# Altium PCB aaa_Empty_PCB_2_Layers.PcbDoc
Units mm, origin at the board's own origin, x right, y up, seen from the top; angles counter-clockwise.
Board outline 100 x 100 mm, 4 copper layers (Top Layer, Signal Layer 2, GND Layer 3, Bottom Layer), stack 2.294 mm thick; 1 components, 2 nets, 0 pads, 0 vias.
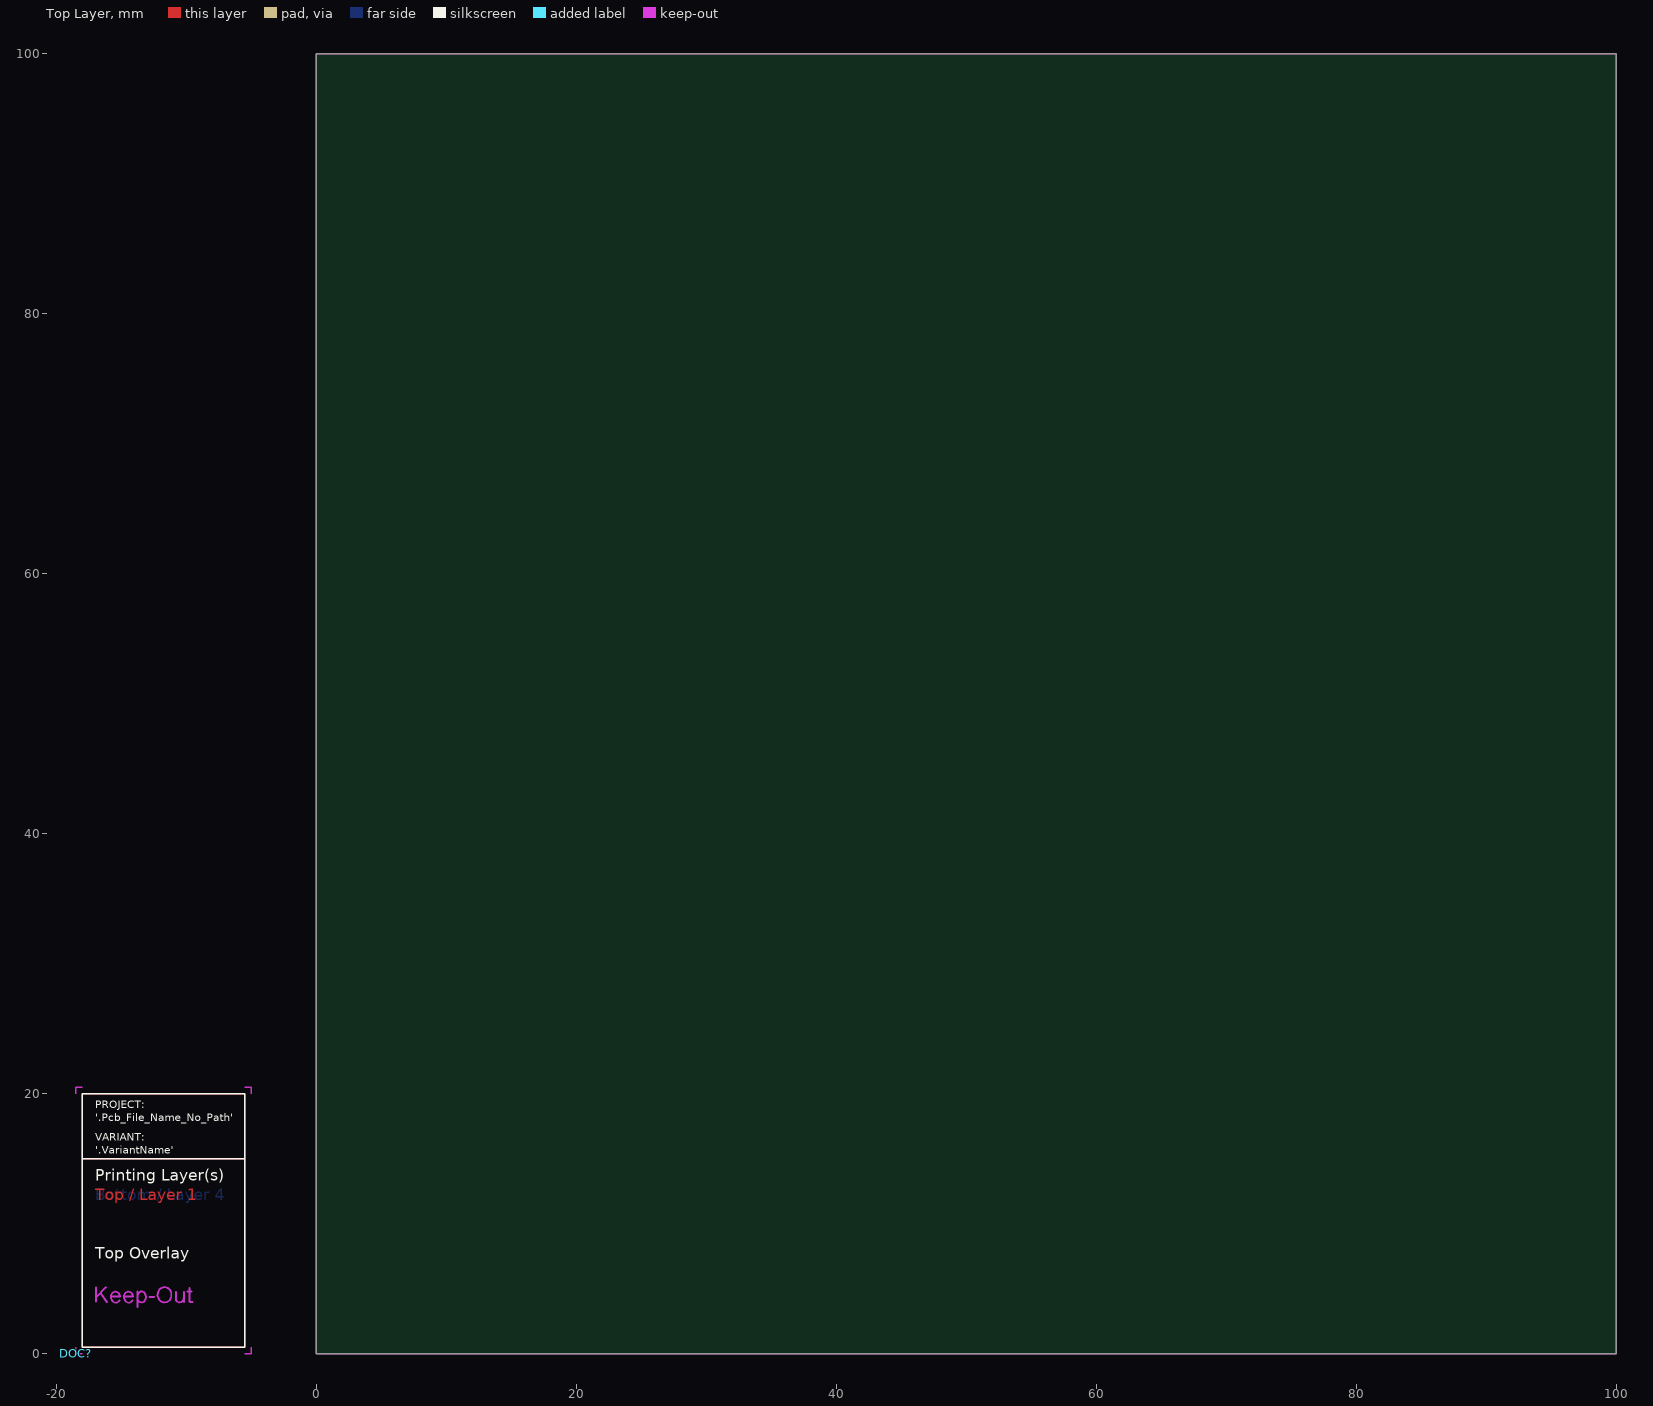
[diagram p0: Top Layer view]
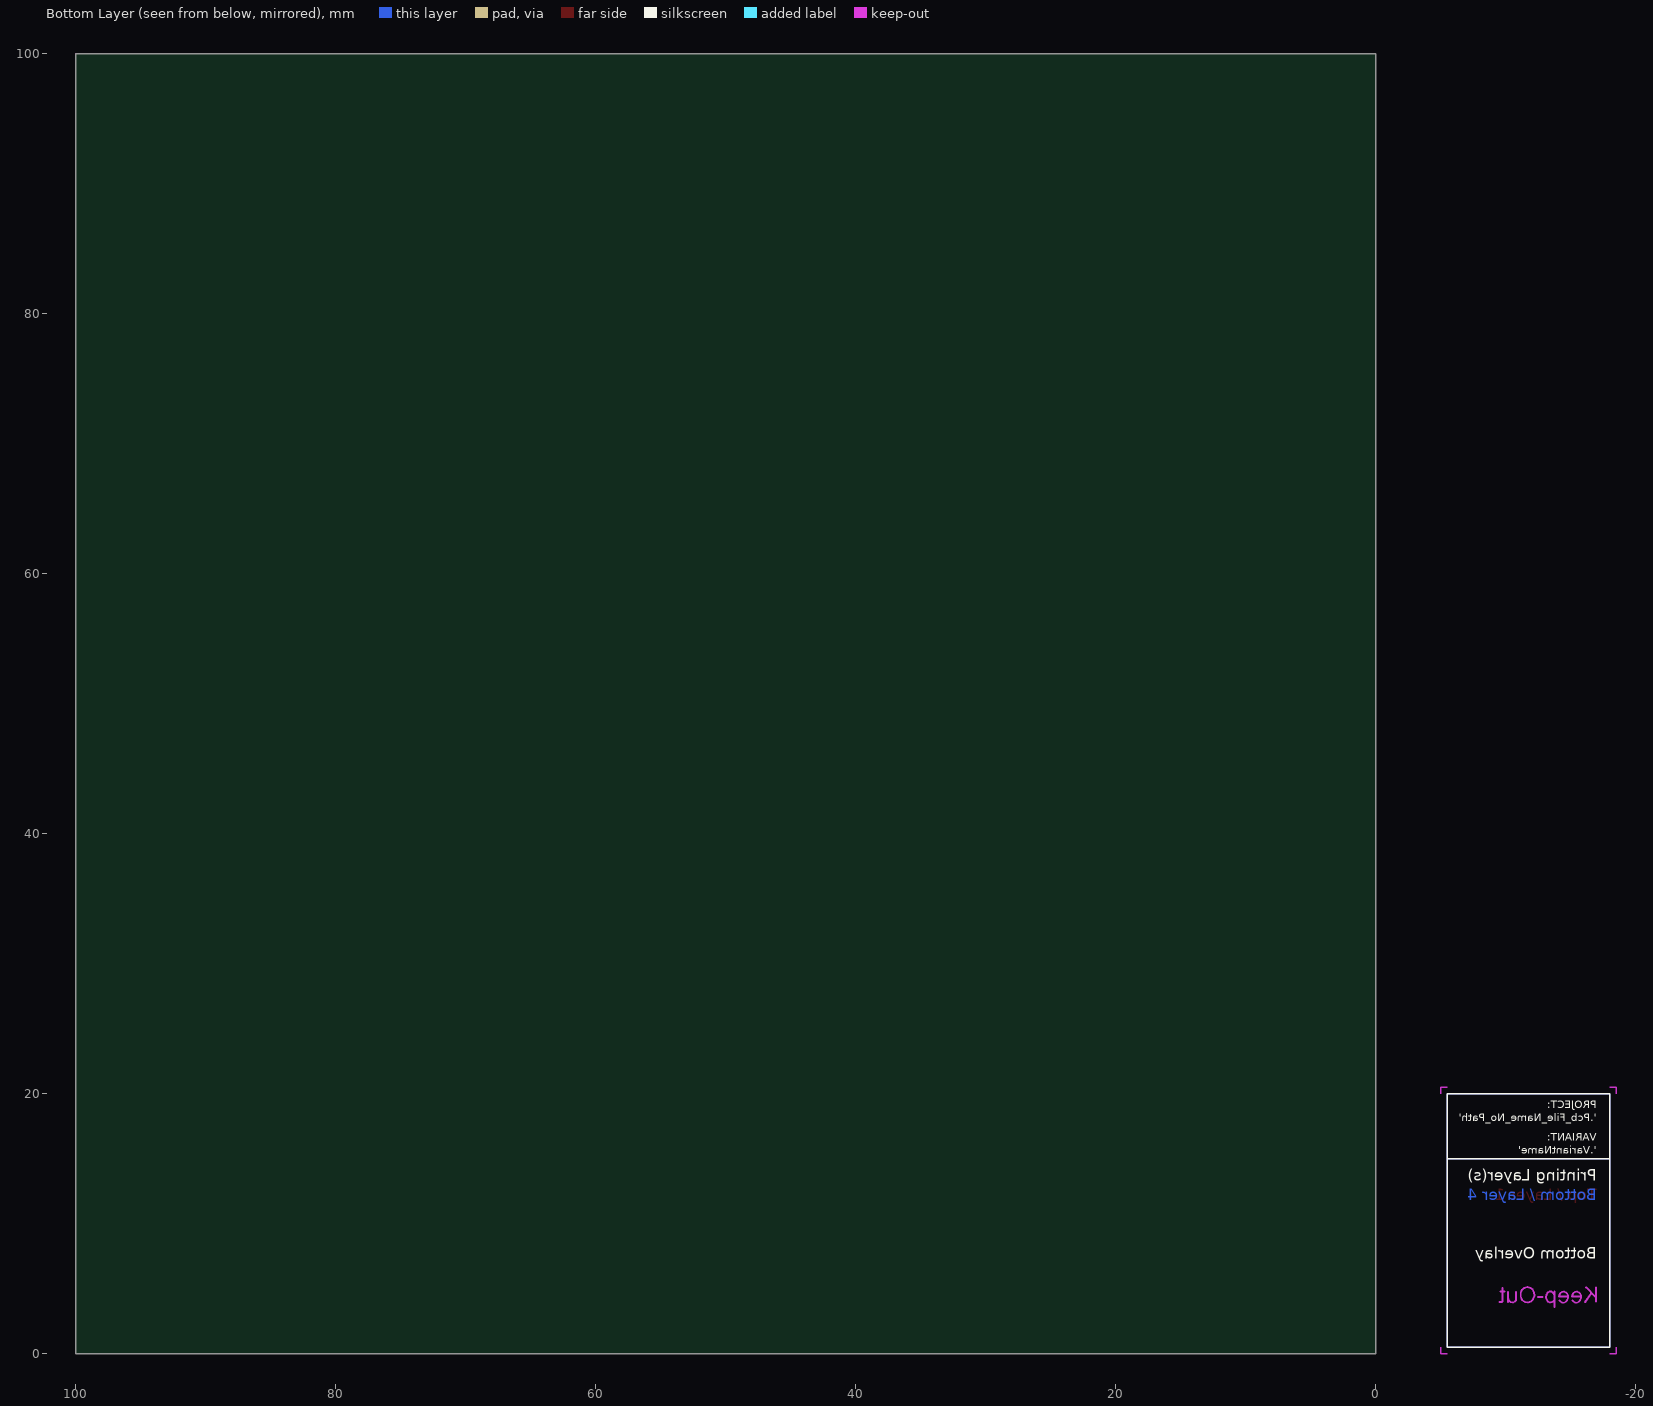
[diagram p1: Bottom Layer view, seen from below]
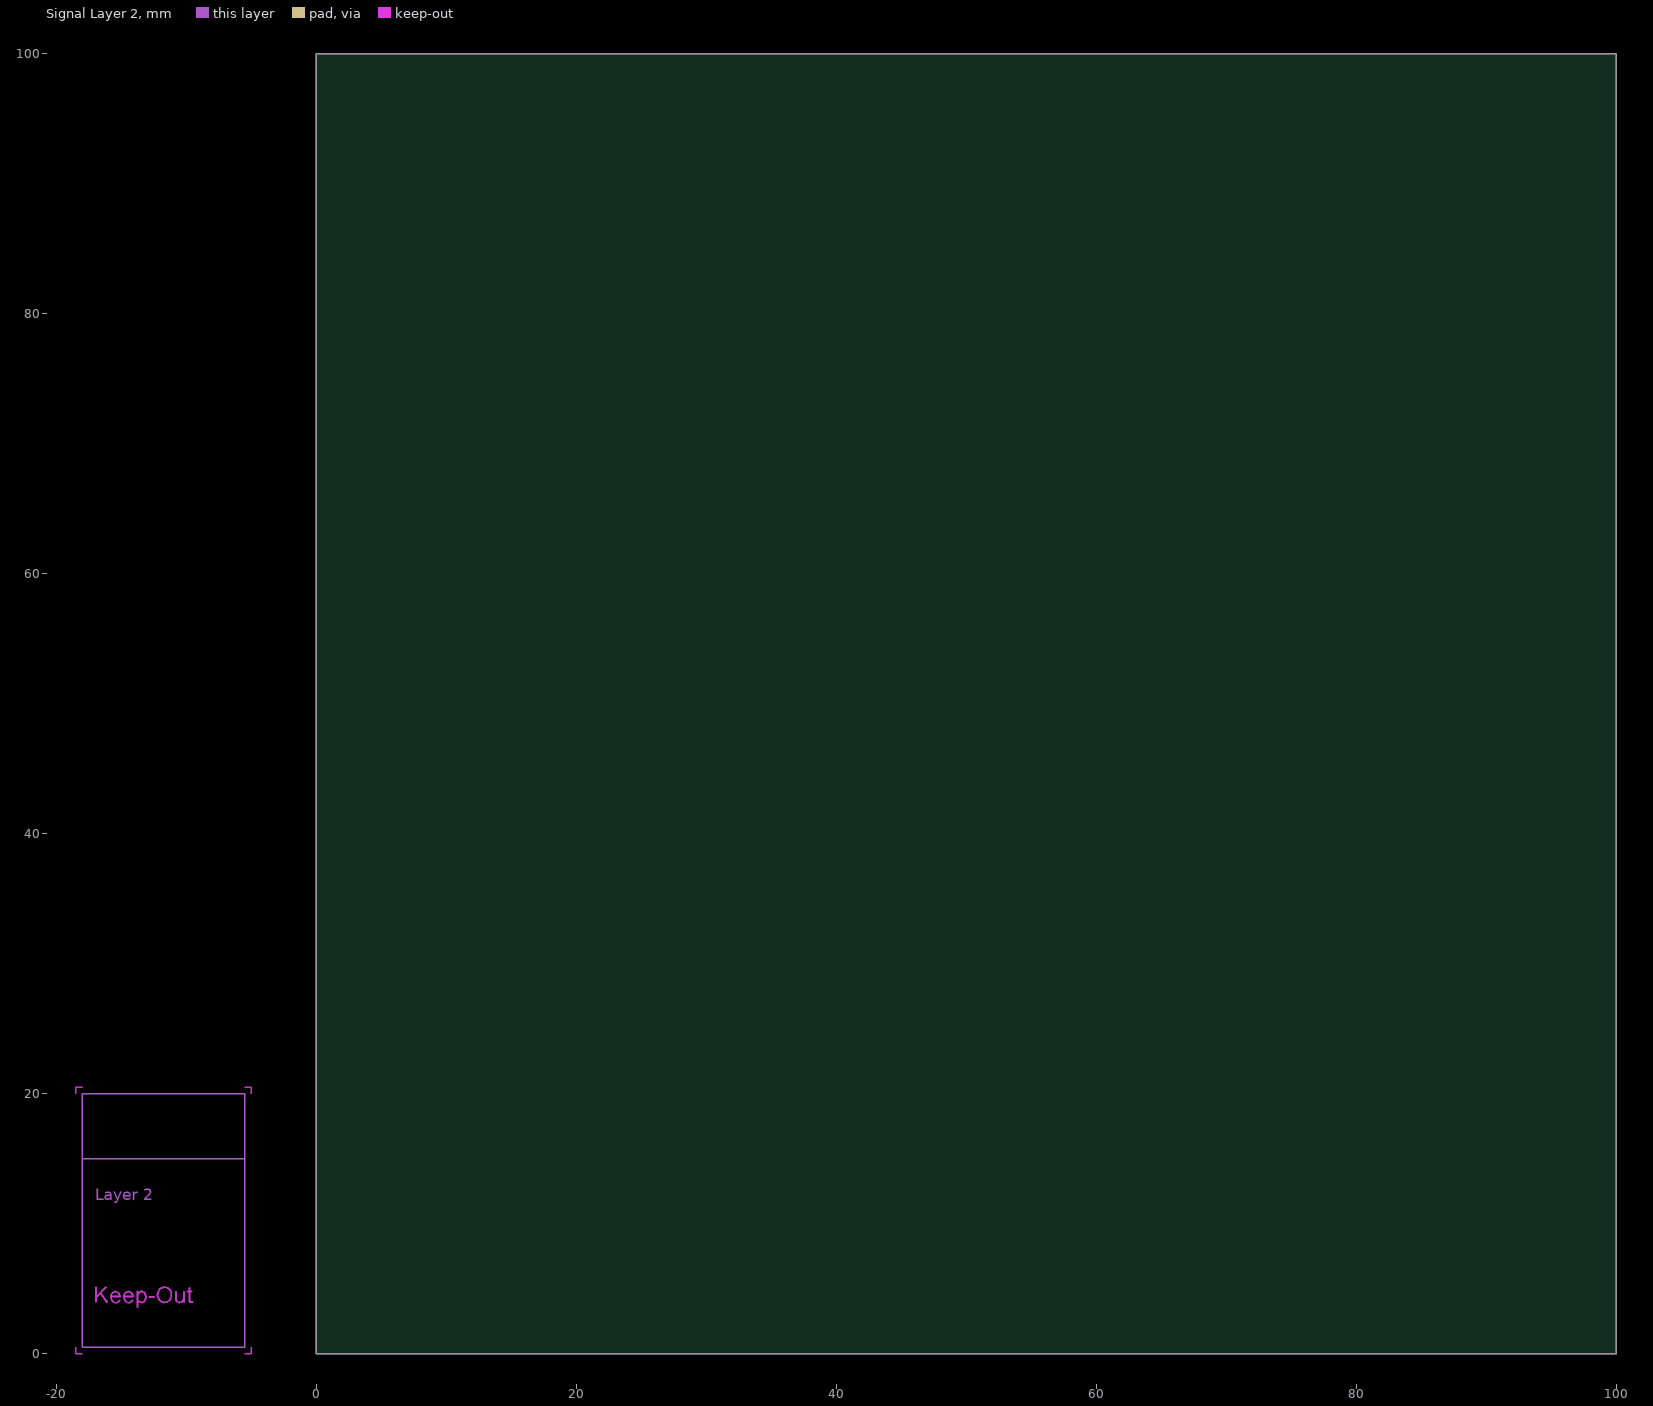
[diagram p2: Signal Layer 2]
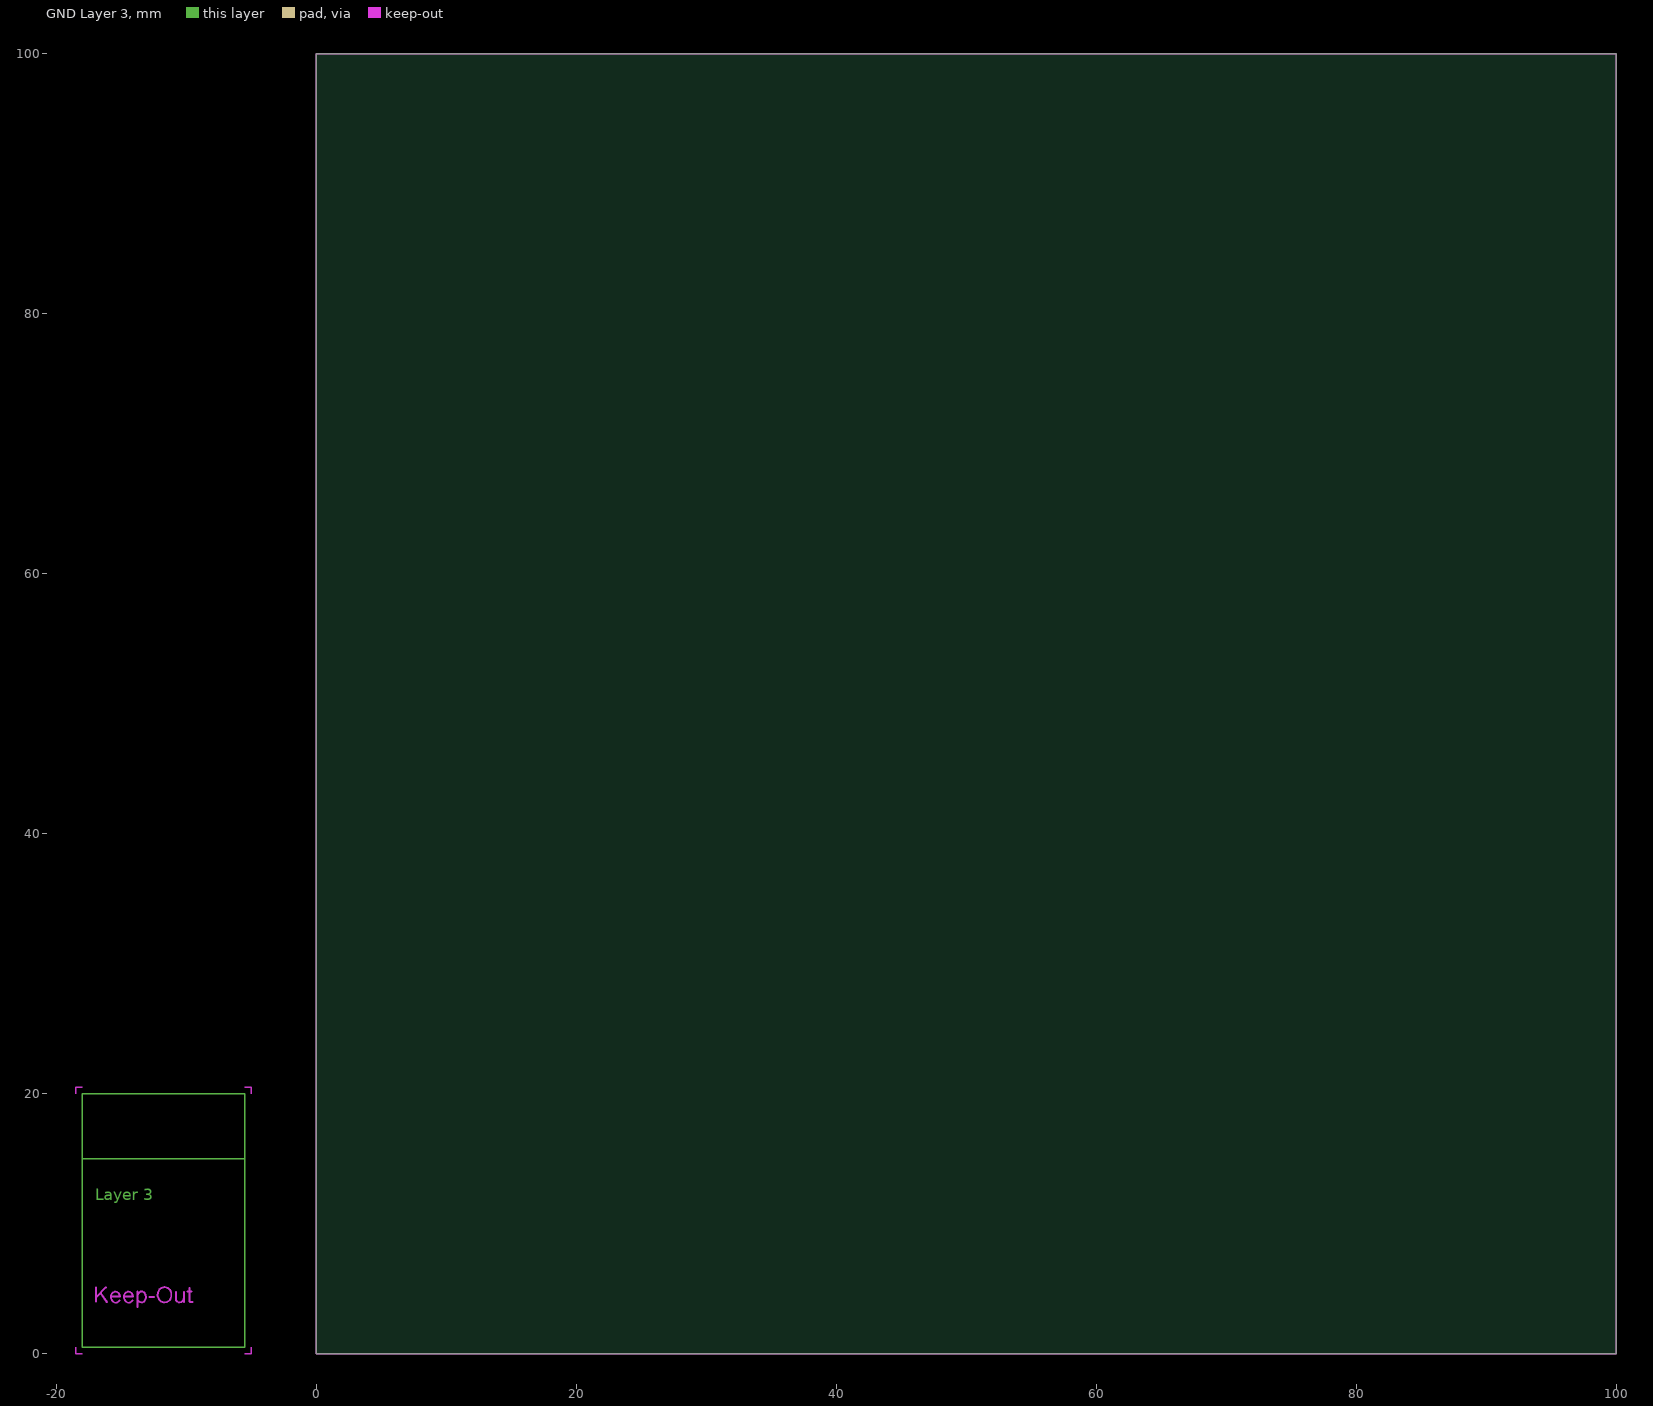
[diagram p3: GND Layer 3]

## Layer stack, top to bottom
Top Solder: solder mask 0.03, Solder Resist, Dk 3.5
Top Layer: signal copper 0.035
Dielectric 1: core 1.514, FR-4, Dk 4.2
Signal Layer 2: signal copper 0.035
Dielectric3: dielectric 0.32, FR-4, Dk 4.8
GND Layer 3: signal copper 0.035
Dielectric1: dielectric 0.32, FR-4, Dk 4.8
Bottom Layer: signal copper 0.035
Bottom Solder: solder mask 0.03, Solder Resist, Dk 3.5

## Board outline
0,0 0,100 100,100 100,0

## Design rules (kind name [scope] priority, off if disabled: settings)
BoardOutlineClearance [All] p1: gap=0.254 ignorepadtopadclearanceinfootprint=FALSE except(0: Arc-SplitContinuation Track-SplitContinuation SMDPad-SplitContinuation THPad-SplitContinuation Via-SplitContinuation Fill-SplitContinuation Poly-SplitContinuation Region-SplitContinuation Text-SplitContinuation)
Clearance Clearance_Mini-IC [InNetClass('Mini-IC-Connections')] p1: gap=0.15 ignorepadtopadclearanceinfootprint=TRUE
Clearance Clearance_Text_BOT [InComponent('XXXX_CON101') vs (OnBottomLayer AND IsText)] p2 off: gap=0.01 ignorepadtopadclearanceinfootprint=FALSE except(0: Arc-Hole Track-Hole SMDPad-Hole THPad-Hole Via-Hole Fill-Hole Poly-Hole Region-Hole Text-Hole)
Clearance Clearance_Antennas [(   InComponent('HYB301') OR InComponent('HYB302') OR InComponent('HYB303')  OR InComponent('MEC504') ) vs (   InComponent('HYB301') OR InComponent('HYB302') OR InComponent('HYB303')  OR InComponent('MEC504') )] p3 off: gap=-3 ignorepadtopadclearanceinfootprint=FALSE
Clearance Clearance_GND-Planes [(InNet('GND') OR InNet('SGND')) and InPolygon] p4 off: gap=0.2 ignorepadtopadclearanceinfootprint=TRUE
Clearance [All] p5: gap=0.3 ignorepadtopadclearanceinfootprint=TRUE
ComponentClearance ComponentClearance_HYB_TOP [(   InComponent('HYB301') OR InComponent('HYB302') OR InComponent('HYB303') ) vs (   InComponent('HYB301') OR InComponent('HYB302') OR InComponent('HYB303')   )] p1: gap=-0.1 collisioncheckmode=3 verticalgap=2540 showdistances=FALSE
ComponentClearance ComponentClearance_FREEDOM_TOP [(   InComponent('HYB300'))] p2: gap=-0.1 collisioncheckmode=3 verticalgap=2540 showdistances=FALSE
ComponentClearance ComponentClearance_TP [(HasFootprint('TESTPAD_RND_28') OR HasFootprint('TESTPAD_RND_40'))] p3: gap=-20 collisioncheckmode=3 verticalgap=2 showdistances=FALSE
ComponentClearance ComponentClearance_MEC1&2 [(InComponent('xxx_MEC1') OR InComponent('xxx_MEC2'))] p4: gap=-2 collisioncheckmode=3 verticalgap=-20 showdistances=FALSE
ComponentClearance [All] p5: gap=0.2 collisioncheckmode=3 verticalgap=0.3 showdistances=FALSE
HoleSize [All] p1: absolutevalues=TRUE maxlimit=22 minlimit=0.3 maxpercent=80.000 minpercent=20.000
HoleToHoleClearance [All] p1: gap=0.25 allowstackedmicrovias=TRUE
MinimumAnnularRing [All] p1: minimumring=0.2
MinimumSolderMaskSliver MinimumSolderMaskSliver_CloseComp [InComponent('X100') OR  InComponent('LED203') OR InComponent('LED301') OR InComponent('U206') OR InComponent('U200') OR InComponent('S200') OR InComponent('R301') OR InComponent('LED300') OR InComponent('U302') OR InComponent('U301') OR InComponent('R302') OR InComponent('R303') vs InComponent('X100') OR  InComponent('LED203') OR InComponent('LED301') OR InComponent('U206') OR InComponent('U200') OR InComponent('S200') OR InComponent('R301') OR InComponent('LED300') OR InComponent('U302') OR InComponent('U301') OR InComponent('R302') OR InComponent('R303')] p1 off: minsoldermaskwidth=0.01
MinimumSolderMaskSliver MinimumSolderMaskSliver_CloseComp_1 [InComponent('C210') OR InComponent('C213') OR InComponent('C214') OR InComponent('Y200') OR InComponent('U206') OR InComponent('TP200') OR InComponent('TP201') OR InComponent('Y201') OR InComponent('U300') vs InComponent('C210') OR InComponent('C213') OR InComponent('C214') OR InComponent('Y200') OR InComponent('U206') OR InComponent('TP200') OR InComponent('TP201') OR InComponent('Y201') OR InComponent('U300')] p2 off: minsoldermaskwidth=0.01
MinimumSolderMaskSliver MinimumSolderMaskSliver_CloseComp_2 [InComponent('C204') OR InComponent('C207') OR InComponent('C209') OR InComponent('C212') OR InComponent('R203') OR InComponent('R204') OR InComponent('U203') OR InComponent('U204') OR InComponent('U205') OR InComponent('IC200') OR InComponent('Y201') OR InComponent('Y200') OR InComponent('TP201') vs InComponent('C204') OR InComponent('C207') OR InComponent('C209') OR InComponent('C212') OR InComponent('R203') OR InComponent('R204') OR InComponent('U203') OR InComponent('U204') OR InComponent('U205') OR InComponent('IC200') OR InComponent('Y201') OR InComponent('Y200') OR InComponent('TP201')] p3 off: minsoldermaskwidth=0.01
MinimumSolderMaskSliver MinimumSolderMaskSliver_TextComp [InComponent('CON200') OR InComponent('X100') OR InComponent('S200') OR InComponent('U301') OR IsText vs InComponent('CON200') OR InComponent('X100') OR InComponent('S200') OR InComponent('U301') OR IsText] p4 off: minsoldermaskwidth=0.01
MinimumSolderMaskSliver [All] p5: minsoldermaskwidth=0.1
PasteMaskExpansion [All] p1: expansion=-0.05
PolygonConnect PolygonConnect_Direct [All] p1: connectstyle=Direct reliefconductorwidth=0.254 reliefentries=4 polygonreliefangle="90 Angle" airgapwidth=0.254
PolygonConnect PolygonConnect_Connector [(InComponent('X100') or InComponent('X111') or InComponent('X112') or InComponent('X101') or InComponent('X106')or InComponent('X107') or InComponent('X104') or InComponent('X105')) AND InNet('GND')] p2 off: connectstyle=Direct reliefconductorwidth=0.254 reliefentries=4 polygonreliefangle="90 Angle" airgapwidth=0.254
PolygonConnect PolygonConnect_Via [IsVia] p3 off: connectstyle=Direct reliefconductorwidth=0.254 reliefentries=4 polygonreliefangle="90 Angle" airgapwidth=0.254
PolygonConnect [All] p4 off: connectstyle=Relief reliefconductorwidth=0.254 reliefentries=4 polygonreliefangle="90 Angle" airgapwidth=0.254
RoomDefinition U103 [InComponentClass('U103')] p1: confinementstyle=ConfineIn formatcopy=TRUE lockcomponents=FALSE outline -17,-14.5 213,-14.5 213,178.1 -17,178.1
RoomDefinition U102 [InComponentClass('U102')] p2: confinementstyle=ConfineIn formatcopy=TRUE lockcomponents=FALSE outline -26.8,-3.5 229.2,-3.5 229.2,203.5 -26.8,203.5
RoomDefinition U101 [InComponentClass('U101')] p3: confinementstyle=ConfineIn formatcopy=TRUE lockcomponents=FALSE outline -30,-9.5 186.9,-9.5 186.9,198 -30,198
RoomDefinition U100 [InComponentClass('U100')] p4: confinementstyle=ConfineIn formatcopy=TRUE lockcomponents=FALSE outline -22.1,8.2 194.5,8.2 194.5,183.5 -22.1,183.5
RoutingVias [All] p1: holewidth=0.4 width=0.9 viastyle="Through Hole" minholewidth=0.3 minwidth=0.6 maxholewidth=0.8 maxwidth=1.2
SilkToSilkClearance [All] p1 off: silktosilkclearance=0.254
SilkToSolderMaskClearance SilkscreenOverComponentPads [IsPad] p1 off: minsilkscreentomaskgap=0.254 clearancetoexposedcopper=TRUE
SolderMaskExpansion [All] p1: expansion=0.102 istentingtop=FALSE
Width [All] p1: maxlimit=10 minlimit=0.15 preferedwidth=0.3 minimp=50.000000 maximp=50.000000 favimp=50.000000
23 further rules are at their usual default settings.

## Components (designator, comment, footprint, x,y, rotation, side; value= is the part's Value field where it differs from the comment)
DOC? "Legend of PCB Layers" "LEGEND OF VISABLE LAYERS FOR PCB OUTPUT FILES (UP TO 4 LAYER PCBS)" -18.5,0 r0 top

## Footprints (in the part's own frame and the unit in brackets; to place one, negate y for a bottom-side part, rotate by r counter-clockwise, add the part's x,y. Pads: shape width x height; smd on the part's side, far side on the other; paste and mask are expansions set on the pad)
"LEGEND OF VISABLE LAYERS FOR PCB OUTPUT FILES (UP TO 4 LAYER PCBS)" [mm] "Description Legend for Documentation"
  Keep-Out Layer lines w0.1: 0,0.5 0,0 0.5,0 ; 0,20 0,20.5 0.5,20.5 ; 13,0 13.5,0 13.5,0.5 ; 13,20.5 13.5,20.5 13.5,20
  Keep-Out Layer lines w0.15: 1.575,4 1.575,5.1 ; 1.6,4.375 2.325,5.1 ; 1.925,4.65 2.4,3.975 ; 2.725,4.4 3.4,4.4 3.375,4.55 3.3,4.675 3.175,4.75 3.025,4.775 2.875,4.725 2.775,4.625 2.725,4.5 2.725,4.3 2.775,4.125 2.875,4 3.025,3.925 3.175,3.95 3.325,4.05 3.375,4.1 ; 3.725,4.4 4.4,4.4 4.375,4.55 4.3,4.675 4.175,4.75 4.025,4.775 3.875,4.725 3.775,4.625 3.725,4.5 3.725,4.3 3.775,4.125 3.875,4 4.025,3.925 4.175,3.95 4.325,4.05 4.375,4.1 ; 4.75,3.6 4.75,4.775 ; 4.75,4.5 4.85,4.675 4.975,4.775 5.125,4.775 5.275,4.7 5.375,4.55 5.4,4.325 5.35,4.15 5.25,4 5.1,3.95 4.95,3.975 4.775,4.1 ; 5.675,4.375 6.025,4.375 ; 6.825,5.125 6.6,5.075 6.425,4.95 6.325,4.725 6.3,4.45 6.4,4.2 6.55,4.025 6.775,3.95 7.025,3.975 7.25,4.125 7.35,4.4 7.35,4.7 7.25,4.925 7.075,5.075 6.85,5.125 ; 7.725,4.75 7.725,4.1 7.825,4 7.95,3.95 8.125,3.975 8.275,4.125 8.325,4.325 8.325,4.75 8.325,3.975 ; 8.75,5.05 8.75,4.775 ; 8.975,3.975 8.925,3.975 8.8,3.975 8.75,4.05 8.75,4.775 ; 8.75,4.775 8.925,4.775 8.6,4.775 8.75,4.775
  Multi-Layer lines w0.1: 0.5,15 13,15 ; 0.5,0.5 13,0.5 13,20 0.5,20 0.5,0.5
  silkscreen extent 0.5,0.5 13,20

## Part data
DOC?: library part "Legend of Visable Layers for PCB Output Files (up to 4 Layer PCBs)", "To show in a table, beside the designed Printed Circuit Board, all visable PCB layers at the generated PDF and Gerber/ODB++ Outputs for Documentation. With this Legend one can see clearly which Layers are actually shown at a certain plot.", ComponentLink1Description="Show Datasheet on SMS Drive", ComponentLink1URL="P:\Electronic Workshop\Datasheets (Refered in Libraries - Don't Change!)\", Latest Revision Date=8.6.2019, Latest Revision Made By="Michael Herold-Nadig", Latest Revision Note="New Part"

## Nets (pads, with @x,y where several pads share a name; then routed paths per layer and width w, separated by ;. In a path a pad name is that pad's centre, name@x,y a point inside that pad or via, vN(x,y) a via of type N, cw(c..) or ccw(c..) an arc to the next point about the centre after c; other vN are vias at no path point)
+3V0: 
GND: 

## Keep-outs
Keep-Out Layer:
  the board outline again, w0.013

## Other copper
Top Layer:
  text "TOP (Normal Size)" at 33,-17.5 h1
  text "TOP (Small Size)" at 40,-23.5 h0.7
  text "TOP" at 14,-25 h1
  text "SMS-2017.11 (0.7 MM IST MIN. TEXTHOEHE)" at 40,-27 h0.7
  text "SMS-2019.9" at 10.9,-28.5 h1
Bottom Layer:
  text "BOT (Normal Size)" at 49,-19.5 h1
  text "BOT (Small Size)" at 50,-24.5 h0.7
  text "BOT" at 13.5,-25 h1

## Silkscreen, mask and mechanical layers (free items; w line width, h text height)
Top Solder:
  text "SMS LAB - SOMNOMAT V5" at -0.5,-17.5 h1
  text "SMS-2019.9" at 10.9,-28.5 h1

## Dimensions
100,0 to 100,100 on Mechanical 1
0,0 to 100,0 on Mechanical 1

## Text inside footprints (layer, text, board x,y; h text height)
DOC?: Top Layer "Top / Layer 1" at -17,11.5 h1.5; Mechanical 1 "Printing Layer(s)" at -17,13 h1.5; Mechanical 1 "Mechanical 1" at -17,10 h1.5; Mechanical 1 "VARIANT: / '.VariantName'" at -17,15.176 h1; Mechanical 1 "PROJECT: / '.Pcb_File_Name_No_Path'" at -17,17.676 h1; Top Overlay "Printing Layer(s)" at -17,13 h1.5; Top Overlay "Top Overlay" at -17,7 h1.5; Top Overlay "PROJECT: / '.Pcb_File_Name_No_Path'" at -17,17.676 h1; Top Overlay "VARIANT: / '.VariantName'" at -17,15.176 h1; Top Solder "Printing Layer(s)" at -17,13 h1.5; Top Solder "Top Solder" at -17,5.5 h1.5; Top Solder "VARIANT: / '.VariantName'" at -17,15.176 h1; Top Solder "PROJECT: / '.Pcb_File_Name_No_Path'" at -17,17.676 h1; Mechanical 13 "Mechanical      13" at -17,10 h1.5; Bottom Layer "Bottom / Layer 4" at -17,11.5 h1.5; Top Paste "Printing Layer(s)" at -17,13 h1.5; Top Paste "Top Paste" at -17,8.5 h1.5; Top Paste "VARIANT: / '.VariantName'" at -17,15.176 h1; Top Paste "PROJECT: / '.Pcb_File_Name_No_Path'" at -17,17.676 h1; GND Layer 3 "Layer 3" at -17,11.5 h1.5; Multi-Layer "Printing Layer(s)" at -17,13 h1.5; Multi-Layer "VARIANT: / '.VariantName'" at -17,15.176 h1; Multi-Layer "PROJECT: / '.Pcb_File_Name_No_Path'" at -17,17.676 h1; Bottom Overlay "Printing Layer(s)" at -17,13 h1.5; Bottom Overlay "Bottom Overlay" at -17,7 h1.5; Bottom Overlay "VARIANT: / '.VariantName'" at -17,15.176 h1; Bottom Overlay "PROJECT: / '.Pcb_File_Name_No_Path'" at -17,17.676 h1; Signal Layer 2 "Layer 2" at -17,11.5 h1.5; Drill Guide "Printing Layer(s)" at -17,13 h1.5; Drill Guide "Drill Guide" at -17,1 h1.5; Bottom Solder "Printing Layer(s)" at -17,13 h1.5; Bottom Solder "Bottom Solder" at -17,5.5 h1.5; Bottom Paste "Printing Layer(s)" at -17,13 h1.5; Bottom Paste "Bottom Paste" at -17,8.5 h1.5; Bottom Paste "VARIANT: / '.VariantName'" at -17,15.176 h1; Bottom Paste "PROJECT: / '.Pcb_File_Name_No_Path'" at -17,17.676 h1; Drill Drawing "Drill Drawing" at -17,2.5 h1.5; Drill Drawing "Printing Layer(s)" at -17,13 h1.5